# Altium PCB XILINX_LA11.PcbDoc (part 2 of 2)
Units mil, origin at the board's own origin, x right, y up, seen from the top; angles counter-clockwise.
Board outline 4330.71 x 2834.65 mil, 2 copper layers (Top Layer, Bottom Layer); 123 components, 151 nets, 621 pads, 218 vias.
Unrouted connection lines stored in the file: 1.
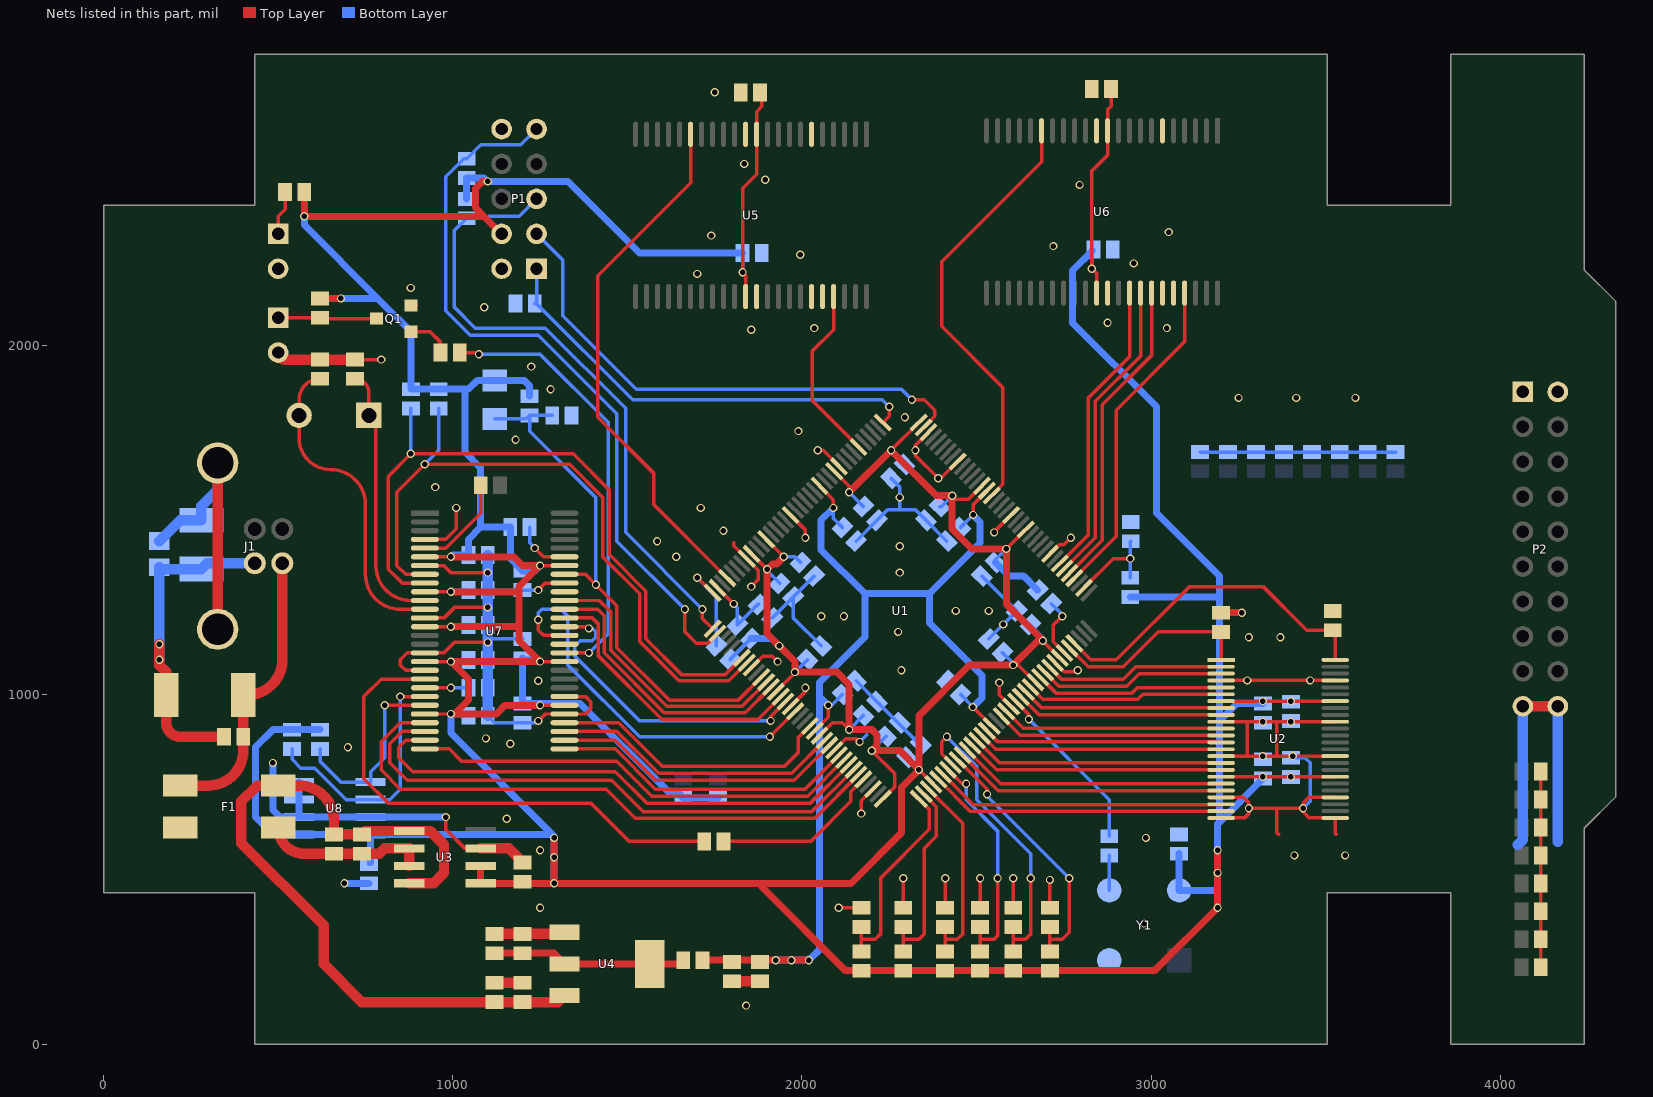
[diagram p2: the nets of this part, all layers, seen from the top]

## Via types
v1: diameter 23.62, hole 15.75, Top Layer to Bottom Layer, 218 vias

## Nets (pads, with @x,y where several pads share a name; then routed paths per layer and width w, separated by ;. In a path a pad name is that pad's centre, name@x,y a point inside that pad or via, vN(x,y) a via of type N, cw(c..) or ccw(c..) an arc to the next point about the centre after c; other vN are vias at no path point) (continued)
DQ29: U1.79 U6.36 | length 857.4
  Top Layer w10: U1.79@2738.14,1375.81 2820,1457.67 2820,1850 2938.03,1968.03 U6.36@2938.03,2150.43
DQ30: U1.78 U6.37 | length 878.6
  Top Layer w10: U1.78@2752.06,1361.89 2840,1449.83 2840,1840 2969.53,1969.53 U6.37@2969.53,2150.43
DQ31: U1.77 U6.38 | length 899.8
  Top Layer w10: U1.77@2765.98,1347.97 2860,1442 2860,1830.46 3001.02,1971.48 U6.38@3001.02,2150.43
FD0: U1.31 U7.25 | length 1703.5
  Top Layer w10: U7.25@920,920 850,920 795,865 795,785 850,730 1440,730 1523,647 2037.17,647 U1.31@2161.87,771.71
FD1: U1.30 U7.26 | length 1605.4
  Top Layer w10: U7.26@920,895 855,895 820,860 820,805 870,755 1455,755 1545,665 2027.33,665 U1.30@2147.95,785.63
FD2: U1.29 U7.27 | length 1501.5
  Top Layer w10: U7.27@920,870 865,870 845,850 845,820 885,780 1465,780 1555,690 2024.49,690 U1.29@2134.03,799.55
FD3: U1.28 U7.28 | length 1298.9
  Top Layer w10: U7.28@920,845 990,845 1025,810 1470,810 1570,710 2016.65,710 U1.28@2120.11,813.46
FD4: U1.27 U7.29 | length 874.2
  Top Layer w10: U7.29@1320,845 1465,845 1580,730 2008.81,730 U1.27@2106.19,827.38
FD5: U1.25 U7.30 | length 847.5
  Top Layer w10: U7.30@1320,870 1465.46,870 1580.46,755 1978.13,755 U1.25@2078.36,855.22
FD6: U1.24 U7.31 | length 833.1
  Top Layer w10: U7.31@1320,895 1470,895 1590,775 1970.29,775 U1.24@2064.44,869.14
FD7: U1.21 U7.32 | length 827.8
  Top Layer w10: U7.32@1320,920 1475,920 1600,795 1950,795 1990,835 1990,878.22 U1.21@2022.68,910.9
fpga_10k: R10.2 U1.67 | length 177.8
  Top Layer w10: v1(2745,1225) 2720,1200 2720,1151.75 U1.67@2752.06,1119.69
  Bottom Layer w10: R10.2@2713.97,1261.03 2745,1230 v1(2745,1225)
FPGA_CH0: U1.64 U2.2 | length 518
  Top Layer w10: U1.64@2710.3,1077.93 2743.23,1045 2920,1045 2955.31,1080.32 U2.2@3200,1080.32
FPGA_CH1: U1.63 U2.3 | length 534.5
  Top Layer w10: U1.63@2696.38,1064.01 2735.39,1025 2930,1025 2965.63,1060.63 U2.3@3200,1060.63
FPGA_CH2: U1.62 U2.5 | length 543
  Top Layer w10: U1.62@2682.46,1050.1 2727.55,1005 2945,1005 2960.09,1020.09 3198.83,1020.09 U2.5@3200,1021.26
FPGA_CH3: U1.60 U2.6 | length 566
  Top Layer w10: U1.60@2654.62,1022.26 2689.88,987 2962,987 2976.57,1001.57 U2.6@3200,1001.57
FPGA_CH4: U1.59 U2.8 | length 578.4
  Top Layer w10: U1.59@2640.7,1008.34 2686.83,962.2 U2.8@3200,962.2
FPGA_CH5: U1.58 U2.9 | length 594.7
  Top Layer w10: U1.58@2626.78,994.42 2678.68,942.52 U2.9@3200,942.52
FPGA_CH6: U1.55 U2.11 | length 635.5
  Top Layer w10: U1.55@2585.02,952.66 2633.36,904.32 3198.83,904.32 U2.11@3200,903.15
FPGA_CH7: U1.54 U2.12 | length 651.8
  Top Layer w10: U1.54@2571.1,938.74 2625.2,884.64 3198.83,884.64 U2.12@3200,883.47
FPGA_CH8: U1.51 U2.13 | length 685.5
  Top Layer w10: U1.51@2530.45,896.98 U1.51@2529.34,896.98 2561.37,864.95 3198.83,864.95 U2.13@3200,863.78
FPGA_CH9: U1.50 U2.14 | length 700.7
  Top Layer w10: U1.50@2515.43,883.06 2554.39,844.09 U2.14@3200,844.09
FPGA_CH10: U1.49 U2.16 | length 725.2
  Top Layer w10: U1.49@2501.51,869.14 2565.92,804.72 U2.16@3200,804.72
FPGA_CH11: U1.48 U2.17 | length 741.5
  Top Layer w10: U1.48@2487.59,855.22 2557.77,785.04 U2.17@3200,785.04
FPGA_CH12: U1.47 U2.19 | length 765.9
  Top Layer w10: U1.47@2473.67,841.3 2569.3,745.67 U2.19@3200,745.67
FPGA_CH13: U1.46 U2.20 | length 783.1
  Top Layer w10: U1.46@2459.75,827.38 2562.13,725 3199.02,725 U2.20@3200,725.99
FPGA_CH14: U1.42 U2.22 | length 832.5
  Top Layer w10: U1.42@2404.07,771.71 2490.78,685 3157.59,685 3158.03,685.44 3198.83,685.44 U2.22@3200,686.61
FPGA_CH15: U1.41 U2.23 | length 847.5
  Top Layer w10: U1.41@2390.15,757.79 2481.01,666.93 U2.23@3200,666.93
GND: C1.1 C2.1 C3.1 C4.1 C5.1 C6.1 C7.1 C8.1 C9.1 C10.1 C11.1 C12.1 C13.1 C14.1 C15.1 C16.1 C17.1 C18.2 C19.2 C20.1 C21.1 C22.2 C23.2 C24.1 C27.2 C28.2 C29.2 C30.2 C31.1 C32.1 C33.1 C34.1 C35.1 C36.1 C37.1 C38.1 C39.1 C40.1 C41.1 C42.1 C43.1 C44.1 C45.1 C47.1 C48.1 C50.1 DS1.2 DS2.2 F1.3 P1.2 P1.10 P2.1 P2.2 P2.19 P2.20 Q1.2 R2.1 R4.1 R7.2 R8.1 R12.1 R14.1 R16.1 R18.1 R21.1 R23.2 R24.2 R25.2 R27.2 R28.1 R29.2 R30.2 R31.2 R32.2 R33.2 R34.2 R35.2 R36.2 R37.2 R38.2 R39.2 R40.2 R58.1 U1.9 U1.17 U1.26 U1.34 U1.56 U1.65 U1.81 U1.89 U1.100 U1.106 U1.118 U1.128 U1.137 U2.4 U2.10 U2.15 U2.21 U2.24 U2.25 U2.28 U2.34 U2.39 U2.45 U3.3 U3.6 U3.7 U4.1 U5.6 U5.12 U5.34 U5.39 U5.40 U6.6 U6.12 U6.34 U6.39 U6.40 U7.4 U7.7 U7.13 U7.17 U7.19 U7.33 U7.35 U7.48 U8.2 U8.3 U8.4 U8.7 Y1.2 | length 11618.6
  Top Layer w10: C45.1@720,1960 v1(795,1960) ; Q1.2@880,2114.8 Q1.2@894.8,2114.8 ; U7.19@920,1070 865,1070 850,1085 850,1100 870,1120 U7.17@920,1120 975,1120 1005,1150 v1(1100,1150) ; U7.13@920,1220 975,1220 1005,1250 v1(1100,1250) ; U7.7@920,1370 975,1370 995,1350 v1(1100,1350) ; U7.4@920,1445 980,1445 1010,1475 v1(1010,1535) ; v1(980,650) 980,615 1035,560 U3.3@1080,560 ; v1@1245,920 v1(1245,925) 1265,945 U7.33@1320,945 1380,945 1395,960 1395,980 1380,995 U7.35@1320,995 ; v1(1245,1300) 1265,1320 U7.48@1320,1320 ; 1805,1435 1805,1426.45 U1.137@1841.73,1389.73 1875,1356.45 1875,1330 v1(1855,1310) ; U1.9@1855.64,1077.93 1887.71,1110 1915,1110 v1(1930,1095) ; U1.17@1967,966.58 2010,1009.58 v1(2010,1020) ; U1.128@1967,1515 2010,1472 v1(2010,1450) ; v1(2045,1700) 2060.39,1700 U1.118@2106.19,1654.2 ; U1.26@2092.28,841.3 2125,874.03 2155.97,874.03 v1(2165,865) ; v1(2105,390) 2169.88,390 R4.1@2170,389.88 ; v1(2170,660) 2170,696.32 U1.34@2203.63,729.95 ; R2.1@2290,389.88 v1(2290,475) ; U1.106@2362.31,1751.63 2325,1714.32 2325,1685 v1(2390,1620) 2397.71,1620 U1.100@2445.83,1668.12 ; R8.1@2410,389.88 v1(2410,475) ; R18.1@2510,389.88 v1(2510,475) ; v1@2550,1466.06 U1.89@2598.94,1515 ; v1(2565,1035) 2565,1000.52 U1.56@2598.94,966.58 ; R16.1@2605,389.88 v1(2605,475) ; R14.1@2710,389.88 v1(2710,470) ; U1.81@2710.3,1403.65 2736.65,1430 2750,1430 v1(2770,1450) ; U1.65@2724.22,1091.85 2725.32,1091.85 2750.85,1066.33 2786.33,1066.33 v1(2790,1070) ; U2.24@3200,647.24 3267.24,647.24 3280,660 v1(3280,675) ; U2.21@3200,706.3 3263.7,706.3 3280,690 v1(3280,675) ; U2.15@3200,824.41 3275,824.41 ; U2.10@3200,922.84 3275,922.84 ; U2.4@3200,1040.95 U2.45@3526.77,1040.95 ; 3360,917.84 3360,824.41 ; 3365,600 3360,605 3360,675 ; U2.28@3526.77,706.3 3451.3,706.3 3435,690 v1(3435,675) ; U2.34@3526.77,824.41 v1(3405,824.41) 3360,824.41 ; U2.39@3526.77,922.84 v1(3400,922.84) v1(3320,922.84) 3275,922.84 ; 3530,600 3526.77,603.23 U2.25@3526.77,647.24 3452.76,647.24 3435,665 v1(3435,675) ; R40.2@4115.12,220 R39.2@4115.12,300 R38.2@4115.12,380 R37.2@4115.12,460 R36.2@4115.12,540 R35.2@4115.12,620 R34.2@4115.12,700 R33.2@4115.12,780 ; 3275,824.41 v1(3320,824.41) 3360,824.41 ; 3275,824.41 3275,922.84 ; v1(3280,675) 3360,675 ; 3360,675 v1(3435,675)
  Top Layer w30: DS2.2@500,1980 ccw(c520,1980) 520,1960 C44.1@620,1960 C45.1@720,1960 ; U3.7@875.28,510 U3.6@875.28,560 805,560 789.88,544.88 C22.2@740,544.88 C23.2@660,544.88 575.12,544.88 ; U3.3@1080,560 1160,560 C24.1@1200,520 ; C27.2@1120,175.12 C29.2@1200,175.12 ; C28.2@1120,315.12 C30.2@1200,315.12 1315.12,315.12 U4.1@1320,320 ; C31.1@1800,180 C32.1@1880,180 ; P2.19@4064.25,967.24 P2.20@4164.25,967.24 ; 575.12,544.88 cw(c575.12,620) F1.3@500,620 ccw(c575.12,620) 575.12,544.88
  Bottom Layer w10: C40.1@1100,940 1120,920 C47.1@1200,920 1240,920 v1(1245,925) ; v1(1100,1150) 1110,1160 C42.1@1200,1160 ; C37.1@1100,1300 C41.1@1200,1300 v1(1245,1300) ; R12.1@1915,1220 C12.1@1975,1280 ; C11.1@2035,1340 C12.1@1975,1280 ; C1.1@2055,1140 1975,1220 C12.1@1975,1280 ; C14.1@2155,1040 C2.1@2215,980 2335,860 C4.1@2340,860 ; C17.1@2155,1440 C10.1@2215,1500 2245,1530 2280,1530 ; v1(2165,865) 2185.2,885.2 ; C9.1@2255,1620 2280,1595 2280,1530 ; C16.1@2415,1440 C8.1@2355,1500 2325,1530 2280,1530 ; C7.1@2515,1340 C6.1@2615,1240 C5.1@2535,1160 ; R32.2@3140,1695.12 R31.2@3220,1695.12 R30.2@3300,1695.12 R29.2@3380,1695.12 R27.2@3460,1695.12 R25.2@3540,1695.12 R24.2@3620,1695.12 R23.2@3700,1695.12 ; C20.1@3400,820 3440,820 3455,805 3455,695 v1(3435,675)
  Bottom Layer w20: v1(485,805) 485,670 505,650 U8.2@560,650 ; U8.4@560,750 U8.3@560,700 U8.2@560,650 ; v1(690,460) C50.1@760,460 ; v1(980,650) U8.7@764.72,650 U8.2@560,650
  Bottom Layer w30: C40.1@1100,940 R58.1@1100,1020 C39.1@1100,1100 v1(1100,1150) C38.1@1100,1200 v1(1100,1250) C37.1@1100,1300 v1(1100,1350) C43.1@1100,1400 ; 4050,570 4064.25,584.25 P2.19@4064.25,967.24 ; 4164.25,579.25 P2.20@4164.25,967.24
  other v1: 1840,110 2980,345 1250,390 3410,540 3555,540 1250,555 2985,590 1155,645 700,850 1165,860 1095,875 1245,1040 3275,1040.95 3455,1040.95 2285,1070 3280,1165 3370,1165 2275,1180 2576.37,1201.37 2055,1225 2120,1225 2440,1240 2535,1240 2280,1350 1640,1395 2280,1425 1585,1440 2550,1465 1775,1470 1710,1535 2280,1565 950,1595 2325,1700 1180,1730 1990,1755 2295,1795 3250,1850 3415,1850 3585,1850 1280,1875 1225,1940 1855,2045 2035,2050 3045,2050 2875,2065 1090,2110 880,2165 1700,2205 2950,2235 1995,2260 2720,2285 1740,2315 3050,2325 2795,2460 1895,2475 1835,2520 1750,2725
GND_POWER: C25.2 C26.2 C49.2 F1.2 J1.4 R48.2 | length 968.5
  Top Layer w30: v1(160,1145) v1(160,1100) 160,1085 179.53,1065.47 C26.2@179.53,1000 179.53,920.47 ccw(c220,920.47) 220,880 C25.2@344.88,880
  Bottom Layer w30: v1(160,1100) v1(160,1145) R48.2@160,1365.2 165.2,1360 C49.2@280,1360 296.51,1376.51 J1.4@433.26,1376.51
IFCLK: R47.2 U1.32 | length 490.1
  Top Layer w10: R47.2@1775.12,580 2025,580 2140,695 2140,722 U1.32@2175.79,757.79
M0: R1.2 R2.2 U1.38 | length 566.7
  Top Layer w10: R1.2@2290,265 2290,300 ; R2.2@2290,334.76 2290,300 ; U1.38@2348.39,716.03 2385,679.42 2385,595 2350,560 2350,315 2335,300 2290,300
M1: R3.2 R4.2 U1.37 | length 588.7
  Top Layer w10: R3.2@2170,265 2170,300 ; R4.2@2170,334.76 2170,300 ; U1.37@2334.47,702.11 2365,671.58 2365,615 2225,475 2225,315 2210,300 2170,300
M2: R6.2 R8.2 U1.39 | length 581.4
  Top Layer w10: U1.39@2362.31,729.95 2460,632.26 2460,315 2445,300 2410,300 ; R6.2@2410,265 2410,300 ; R8.2@2410,334.76 2410,300
NetC28_1: C28.1 C30.1 L1.1 U4.2 U4.4 | length 557
  Top Layer w20: C28.1@1120,260 C30.1@1200,260 1289.45,260 U4.4@1320,229.45 U4.2@1564.09,229.45 1649.45,229.45 L1.1@1660,240
NetC44_1: C44.2 U7.12 Y2.2 | length 929.7
  Top Layer w10: C44.2@620,1904.88 ccw(c620,1844.88) 560,1844.88 Y2.2@560,1800 560,1735 ccw(c650,1735) 650,1645 cw(c650,1545) 750,1545 750,1345 ccw(c850,1345) 850,1245 U7.12@920,1245
NetC45_2: C45.2 U7.11 Y2.1 | length 766.2
  Top Layer w10: C45.2@720,1904.88 cw(c720,1864.88) 760,1864.88 Y2.1@760,1800 cw(c760,1780) 780,1780 780,1370 ccw(c880,1370) 880,1270 U7.11@920,1270
NetDS1_1: DS1.1 R41.1 | length 128.3
  Top Layer w10: DS1.1@500,2320 500,2370 520,2390 R41.1@520,2440
NetDS2_1: DS2.1 Q1.3 R42.1 | length 282.7
  Top Layer w10: DS2.1@500,2080 R42.1@620,2080 622.6,2077.4 Q1.3@781.57,2077.4
NetDS3_1: 
NetQ1_2: Q1.1 R43.2 | length 127.4
  Top Layer w10: Q1.1@880,2040 935,2040 964.88,2010.12 R43.2@964.88,1980
NetQ2_2: 
NetR5_2: R5.2 R7.1 U1.74 | length 272.5
  Top Layer w10: U1.74@2807.73,1306.21 2891.52,1390 v1(2940,1390)
  Bottom Layer w10: R5.2@2940,1335.12 v1(2940,1390) 2940,1438.48 R7.1@2941.52,1440
NetR9_1: R9.1 U1.144 | length 279.8
  Top Layer w10: v1(1700,1335) 1701.58,1335 U1.144@1744.29,1292.29
  Bottom Layer w10: v1(1700,1335) 1755,1280 R9.1@1755,1140
NetR11_1: R11.1 R12.2 U1.143 | length 215.2
  Top Layer w10: U1.143@1758.21,1306.21 v1(1804.42,1260)
  Bottom Layer w10: v1(1804.42,1260) 1815,1249.42 R11.1@1815,1200 1873.97,1258.97 R12.2@1876.03,1258.97
NetR22_1: R22.1 Y1.3 | length 100
  Bottom Layer w10: Y1.3@2880,440 R22.1@2880,540
NetR47_1: R47.1 U7.20 | length 1480.3
  Top Layer w10: U7.20@920,1045 795,1045 745,995 745,760 815,690 1395,690 1505,580 R47.1@1720,580
NetR49_1: R49.1 U7.5 | length 281.7
  Top Layer w10: U7.5@920,1420 980.46,1420 1080,1519.54 R49.1@1080,1600
NetR50_1: R50.1 U7.51 | length 161.6
  Top Layer w10: v1(1235,1420) 1260,1395 U7.51@1320,1395
  Bottom Layer w10: R50.1@1220,1480 1220,1435 v1(1235,1420)
NetR58_2: R58.2 U7.21 | length 124.9
  Top Layer w10: U7.21@920,1020 v1(995,1020)
  Bottom Layer w10: v1(995,1020) R58.2@1044.88,1020
NLOGICDIR: R26.1 U1.68 U2.1 | length 577.7
  Top Layer w10: U1.68@2765.98,1133.61 2819.59,1080 2920,1080 3020,1180 R26.1@3200,1180 U2.1@3200,1100
NLOGICOE: R28.2 U1.69 U2.48 | length 986.3
  Top Layer w10: U1.69@2779.89,1147.53 2827.43,1100 2900,1100 3110,1310 3320,1310 3445.12,1184.88 R28.2@3520,1184.88 3526.77,1178.11 U2.48@3526.77,1100
NOE_RAM1: U1.114 U5.41 | length 510.2
  Top Layer w10: U5.41@2090.51,2140.43 2090.51,2045.51 2030,1985 2030,1841.75 U1.114@2161.87,1709.88
NOE_RAM2: U1.76 U6.41 | length 947.1
  Top Layer w10: U1.76@2779.89,1334.05 2900,1454.16 2900,1815 3095.51,2010.51 U6.41@3095.51,2150.43
NWE_RAM1: U1.141 U5.17 | length 1534.8
  Top Layer w10: U5.17@1681.06,2605 1681.06,2466.06 1415,2200 1415,1795 1575,1635 1575,1545.1 U1.141@1786.05,1334.05
NWE_RAM2: U1.93 U6.17 | length 1248.4
  Top Layer w10: U1.93@2543.26,1570.68 2575,1602.42 2575,1880 2400,2055 2400,2240 2686.06,2526.06 U6.17@2686.06,2615
PA0: R43.1 U7.40 | length 1255.9
  Top Layer w10: R43.1@1020,1980 1070,1980 v1(1075,1975) ; U7.40@1320,1120 v1(1390,1120)
  Bottom Layer w10: v1@1080,1975 1250,1975 1445,1780 1445,1174.54 1390.46,1120 v1(1390,1120)
PA1: U7.41
PA2: U1.18 U7.42 | length 1134.6
  Top Layer w10: v1(1245,1215) 1245,1185 1260,1170 U7.42@1320,1170 ; v1(1908.26,880) U1.18@1980.92,952.66
  Bottom Layer w10: v1(1245,1215) 1245,1235 1255,1245 1310,1245 1330,1225 1330,1085 1535,880 v1(1908.26,880)
PA3: U1.16 U7.43 | length 921.5
  Top Layer w10: U7.43@1320,1195 1385,1195 v1(1390,1190) ; v1(1910,925) 1910,937.42 U1.16@1953.08,980.5
  Bottom Layer w10: v1(1390,1190) 1400,1190 1410,1180 1410,1165 1400,1155 1365,1155 1350,1140 1350,1110 1535,925 v1(1910,925)
PA4: U1.15 U7.44 | length 819.5
  Top Layer w10: U7.44@1320,1220 1400,1220 1416,1204 1416,1112.63 1598.63,930 1874.74,930 U1.15@1939.16,994.42
PA5: U1.13 U7.45 | length 806.3
  Top Layer w10: U7.45@1320,1245 1415,1245 1434,1226 1434,1120.09 1605.09,949 1838.07,949 U1.13@1911.32,1022.26
PA6: U1.12 U7.46 | length 796.3
  Top Layer w10: U7.46@1320,1270 1420,1270 1452,1238 1452,1127.54 1612.54,967 1828.23,967 U1.12@1897.4,1036.18
PA7: U7.47
RDY0/SLRD#: R55.1 U1.8 U7.8 | length 1970.1
  Top Layer w10: U7.8@920,1345 865,1345 840,1370 840,1580 v1(920,1660) 1335,1660 1430,1565 1430,1394.54 1535,1289.54 1535,1152.72 1647.72,1040 1789.87,1040 U1.8@1841.73,1091.85
  Bottom Layer w10: v1(920,1660) 960,1700 R55.1@960,1820
RDY1/SLWR#: R54.1 U1.7 U7.9 | length 2026.1
  Top Layer w10: U7.9@920,1320 855,1320 815,1360 815,1625 v1(880,1690) 1344.54,1690 1448,1586.54 1448,1402 1553,1297 1553,1160.18 1655.18,1058 1780.03,1058 U1.7@1827.81,1105.77
  Bottom Layer w10: v1(880,1690) R54.1@880,1820
SCL: R56.2 U7.22 U8.6 | length 734.9
  Top Layer w10: v1(850,995) U7.22@920,995
  Bottom Layer w10: R56.2@540,844.88 540,815 565,790 605,790 695,700 U8.6@764.72,700 820,700 850,730 v1(850,995)
SDA: R57.2 U7.23 U8.5 | length 556.1
  Top Layer w10: v1(805,970) U7.23@920,970
  Bottom Layer w10: R57.2@620,844.88 620,810 680,750 U8.5@764.72,750 765,750.28 765,780 805,820 v1(805,970)
SYSCLK: R22.2 U1.57 | length 496
  Top Layer w10: U1.57@2612.86,980.5 2650,943.36 v1(2650,930)
  Bottom Layer w10: v1(2650,930) 2880,700 R22.2@2880,595.12
SYSRST: C48.2 D1.1 R44.1 U1.11 U7.49 | length 1542.8
  Top Layer w10: U7.49@1320,1345 1380.46,1345 1380.46,1344.54 v1(1410,1315) 1470,1255 1470,1135 1620,985 1818.39,985 U1.11@1883.48,1050.1
  Bottom Layer w10: D1.1@1120,1790 1210,1790 R44.1@1220,1800 ; C48.2@1284.88,1800 R44.1@1220,1800 ; v1(1410,1315) 1410,1565 1220,1755 R44.1@1220,1800
TCK: P1.1 R21.2 U1.109 | length 1292.3
  Top Layer w10: U1.109@2231.47,1779.47 2250,1798 v1(2250,1825)
  Bottom Layer w10: P1.1@1240,2220 1240,2124.88 R21.2@1235.12,2120 1240,2120 1515,1845 2230,1845 v1(2250,1825)
TDI: P1.9 R19.2 U1.2 | length 2135.9
  Top Layer w10: v1(1665,1245) 1665,1180 1697,1148 1730.84,1148 U1.2@1758.21,1175.37
  Bottom Layer w10: P1.9@1240,2620 1195,2575 1079.88,2575 R19.2@1040,2535.12 1031.46,2535.12 980,2483.66 980,2100 1050,2030 1245,2030 1470,1805 1470,1440 v1(1665,1245)
TDO: P1.3 U1.107 | length 1505.4
  Top Layer w10: v1(2315,1845) 2350,1845 2380,1815 2380,1797.16 U1.107@2348.39,1765.55
  Bottom Layer w10: P1.3@1240,2320 1315,2245 1315,2085 1525,1875 2285,1875 v1(2315,1845)
TMS: P1.5 R20.2 U1.1 | length 1836.3
  Top Layer w10: v1(1715,1245) 1715,1218.58 U1.1@1744.29,1189.29
  Bottom Layer w10: P1.5@1240,2420 1190,2370 1105,2370 1099.88,2364.88 R20.2@1040,2364.88 1005,2329.88 1005,2110 1065,2050 1265,2050 1495,1820 1495,1465 v1(1715,1245)
USBSHEILD: C49.1 J1.5 R48.1 | length 804.6
  Top Layer w30: J1.5@326.96,1187.53 J1.5@326.96,1663.91
  Bottom Layer w30: R48.1@160,1440 220,1500 C49.1@280,1500 280,1540 326.96,1586.96 J1.5@326.96,1663.91
VBUS: C25.1 C26.1 F1.1 J1.1 | length 842.7
  Top Layer w30: F1.1@220,740 300,740 ccw(c300,840) 400,840 C25.1@400,880 C26.1@400,1000 412,1000 ccw(c412,1100) 512,1100 J1.1@512,1376.51
VCC5: C22.1 C23.1 C27.1 C29.1 F1.4 U3.5 U3.8 U4.3 | length 2214.3
  Top Layer w30: U3.8@875.28,460 945,460 975,490 975,570 935,610 U3.5@875.28,610 800,610 750,610 C22.1@740,600 C23.1@660,600 660,640 ccw(c560,640) 560,740 F1.4@500,740 440,740 395,695 395,575 630,340 630,230 740,120 C27.1@1120,120 C29.1@1200,120 1301.1,120 U4.3@1320,138.9
VCC12: C14.2 C15.2 C16.2 C17.2 C31.2 C32.2 L1.2 U1.22 U1.52 U1.94 U1.122 | length 3296.4
  Top Layer w10: U1.22@2036.6,896.98 2075,935.38 v1(2075,970) ; U1.122@2050.52,1598.52 2090,1559.04 v1(2090,1535) ; v1(2489.17,965) U1.52@2543.26,910.9 ; v1(2490,1515) 2490,1545 2529.34,1584.34 U1.94@2529.34,1584.6
  Top Layer w20: L1.2@1715.12,240 1875.12,240 C32.2@1880,235.12 1884.88,240 v1(2020,240)
  Bottom Layer w10: v1(2075,970) 2085,970 C14.2@2116.03,1001.03 ; v1(2090,1535) 2090,1505 C17.2@2116.03,1478.97 ; C15.2@2453.97,1001.03 2489.17,965.83 v1(2489.17,965) ; C16.2@2453.97,1478.97 v1(2490,1515)
  Bottom Layer w20: v1(1925,240) v1(2020,240) 2050,270 2050,995 ; v1(2075,970) 2050,995 ; v1(2090,1535) 2055,1500 2055,1415 2180,1290 ; v1(2489.17,965) 2515,990.83 2515,1055 2365,1205 2365,1290 ; v1(2490,1515) 2510,1495 2510,1435 2365,1290 ; 2050,995 2050,1035 2180,1165 2180,1290 ; 2180,1290 2365,1290
  other v1: 1970,240
VCC33: C1.2 C2.2 C3.2 C4.2 C5.2 C6.2 C7.2 C8.2 C9.2 C10.2 C11.2 C12.2 C13.2 C18.1 C19.1 C20.2 C21.2 C24.2 C33.2 C34.2 C35.2 C36.2 C37.2 C38.2 C39.2 C40.2 C41.2 C42.2 C43.2 C47.2 C50.2 D1.2 P1.4 R1.1 R3.1 R5.1 R6.1 R9.2 R10.1 R11.2 R13.1 R15.1 R17.1 R19.1 R20.1 R26.2 R41.2 R42.2 R44.2 R50.2 R51.2 R52.2 R54.2 R55.2 R56.1 R57.1 U1.14 U1.23 U1.36 U1.40 U1.61 U1.66 U1.86 U1.95 U1.108 U1.119 U1.133 U1.136 U2.7 U2.18 U2.31 U2.42 U3.1 U3.2 U5.11 U5.33 U6.11 U6.33 U7.6 U7.10 U7.14 U7.18 U7.24 U7.34 U7.39 U7.50 U8.1 U8.8 Y1.4 | length 21954.2
  Top Layer w10: U7.24@920,945 v1(995,945) ; U7.18@920,1095 v1(995,1095) ; U7.14@920,1195 v1(995,1195) ; U7.10@920,1295 v1(995,1295) ; U7.6@920,1395 v1(995,1395) ; v1(1250,970) U7.34@1320,970 ; v1(1250,1095) U7.39@1320,1095 ; v1(1250,1370) U7.50@1320,1370 ; U5.33@1838.54,2140.43 1838.54,2201.46 v1(1830,2210) 1830,2450 1870.04,2490.04 U5.11@1870.04,2605 1870.04,2669.96 1885,2684.92 1885,2720.12 C33.2@1880.12,2725 ; U1.136@1855.64,1403.65 v1(1900,1359.29) ; U1.133@1897.4,1445.41 v1(1947.81,1395) ; U1.14@1925.24,1008.34 v1@1980,1063.1 ; U1.23@2050.52,883.06 2087.45,920 2115,920 v1(2135,900) ; U1.119@2092.28,1640.28 2135,1597.55 v1(2135,1580) ; v1(2200,840) 2265,775 2265,735.64 U1.36@2231.47,702.11 ; v1(2255,1700) U1.108@2334.47,1779.47 ; v1(2335.1,785) U1.40@2376.23,743.87 ; v1(2430,1570) 2440,1560 2476.91,1560 U1.95@2515.43,1598.52 ; v1(2585,1417.55) U1.86@2640.7,1473.25 ; v1(2605,1085) 2619.71,1085 U1.61@2668.54,1036.18 ; v1(2690,1155) 2690,1153.91 U1.66@2738.14,1105.77 ; U6.33@2843.54,2150.43 2843.54,2206.46 v1(2830,2220) 2830,2500 2875.04,2545.04 U6.11@2875.04,2615 2875.04,2675.04 2885.12,2685.12 C34.2@2885.12,2735 ; U2.18@3200,765.36 v1(3320,765.36) v1(3400,765.36) U2.31@3526.77,765.36 ; U2.7@3200,981.89 v1(3320,981.89) v1(3400,981.89) U2.42@3526.77,981.89
  Top Layer w20: R41.2@575.12,2440 575.12,2370.12 v1(575,2370) 1087.21,2370 1088.61,2371.39 ; R42.2@620,2135.12 679.88,2135.12 v1(680,2135) ; v1(995,945) v1@1005,945 ; v1(995,1195) 1190,1195 ; v1(995,1295) 1190,1295 ; v1(995,1395) 1175,1395 1200,1370 v1(1250,1370) 1190,1310 1190,1295 ; U3.2@1080,510 U3.1@1080,460 v1(1290,460) ; v1(1100,2470) 1085,2470 1065,2450 1065,2395 1088.61,2371.39 ; P1.4@1140,2320 1088.61,2371.39 ; v1(1250,970) 1150,970 1125,945 v1@1005,945 ; v1(1290,590) v1(1290,535) v1(1290,460) ; 1885,449.76 2124.88,209.88 R3.1@2170,209.88 R1.1@2290,209.88 R6.1@2410,209.88 R17.1@2510,209.88 R15.1@2605,209.88 R13.1@2710,209.88 3009.88,209.88 v1(3190,390) v1(3190,490) v1(3190,555) ; v1(1947.81,1395) 1927.81,1375 1915.71,1375 v1(1900,1359.29) 1900,1175 v1(1935,1140) 1980,1095 v1(1980,1065) 2100,1065 2135,1030 v1(2135,900) 2200,900 2215,885 2215,855 v1(2200,840) 2280.1,840 v1(2335.1,785) ; v1(2135,1580) v1(2255,1700) 2385,1570 v1(2430,1570) 2430,1475 2487.45,1417.55 v1(2585,1417.55) 2585,1260 v1(2690,1155) ; v1@2690,1153.91 2673.91,1153.91 v1(2605,1085) 2480,1085 2335.1,940.1 v1(2335.1,785) ; R26.2@3200,1235.12 v1(3259.88,1235.12) v1@3260,1235 ; v1@1005,945 1045,985 1045,1045 v1(995,1095) v1(1250,1095) 1190,1155 1190,1195 ; 1190,1195 1190,1295 ; v1(1290,460) 2140,460 2285,605 2285,734.9 v1(2335.1,785)
  Bottom Layer w10: C50.2@760,515.12 C50.2@764.72,519.84 ; v1(995,945) 1000,940 C40.2@1044.88,940 ; v1(995,1095) 1000,1100 C39.2@1044.88,1100 ; v1(995,1195) 1000,1200 C38.2@1044.88,1200 ; v1(995,1295) 1000,1300 C37.2@1044.88,1300 ; C42.2@1200,1104.88 1240.12,1104.88 v1(1250,1095) ; R9.2@1793.97,1101.03 R11.2@1853.97,1161.03 ; C35.2@1829.88,2265 1830,2264.88 v1(1830,2210) ; v1(1900,1359.29) 1900,1355 C12.2@1936.03,1318.97 ; v1(1947.81,1395) 1980,1395 C11.2@1996.03,1378.97 ; v1(1980,1065) C1.2@2016.03,1101.03 ; v1(2135,900) C2.2@2176.03,941.03 ; v1(2135,1580) C10.2@2176.03,1538.97 ; v1(2200,840) C3.2@2241.03,881.03 ; v1(2255,1700) 2255,1697.95 C9.2@2293.97,1658.97 ; C4.2@2301.03,821.03 2335.1,786.95 v1(2335.1,785) ; C8.2@2393.97,1538.97 2398.97,1538.97 v1(2430,1570) ; C7.2@2553.97,1378.97 2553.97,1386.52 v1(2585,1417.55) ; C5.2@2573.97,1121.03 2605,1090 v1(2605,1085) ; C6.2@2653.97,1201.03 2690,1165 v1(2690,1155) ; v1(2830,2220) 2830,2270.12 C36.2@2834.88,2275
  Bottom Layer w20: v1(575,2370) 575,2345 785,2135 ; R57.1@620,900 R56.1@540,900 485,900 435,850 435,650 485,600 U8.1@560,600 U8.8@764.72,600 ; v1(680,2135) 785,2135 ; C50.2@764.72,519.84 U8.8@764.72,600 ; v1(995,945) 995,890 v1@1285,600 ; v1(995,1395) 1000,1400 C43.2@1044.88,1400 1044.88,1444.88 1080,1480 ; R20.1@1040,2420 R19.1@1040,2480 1090,2480 v1(1100,2470) 1330,2470 1535,2265 C35.2@1829.88,2265 ; C42.2@1200,1104.88 C47.2@1200,975.12 v1@1244.88,975.12 ; R44.2@1220,1855.12 1220,1885 1204.76,1900.24 D1.2@1120,1900.24 1070.24,1900.24 1045.12,1875.12 1035,1875.12 ; v1(1250,970) v1@1244.88,975.12 ; v1(1250,1370) 1235.12,1355.12 C41.2@1200,1355.12 1164.88,1390.24 R50.2@1164.88,1480 1080,1480 ; v1(1290,460) v1(1290,535) v1(1290,590) 1290,595 v1@1285,600 ; R52.2@1760,704.88 R51.2@1660,704.88 1642.57,722.32 1617.68,722.32 1364.88,975.12 v1@1244.88,975.12 ; R11.2@1853.97,1161.03 1913.97,1161.03 v1(1935,1140) ; C7.2@2553.97,1378.97 2592.95,1340 2635,1340 R10.1@2675,1300 ; C36.2@2830,2270.12 2775,2215.12 2775,2065 3015,1825 3015,1520 3195,1340 3195,1235 ; R5.1@2940,1280 3190,1280 ; C13.2@3080,544.88 Y1.4@3080,440 3190,440 ; v1(3190,390) 3190,440 ; v1@3259.76,1235 3195,1235 ; C19.1@3320,760 3195,635 ; C21.2@3320,975.12 3245.12,975.12 3195,925 ; U8.8@764.72,600 v1@1285,600 ; 785,2135 880,2040 R54.2@880,1875.12 R55.2@960,1875.12 1035,1875.12 ; 1035,1875.12 1035,1695 1080,1650 1080,1480 ; 3190,440 v1(3190,490) v1(3190,555) 3190,630 3195,635 ; 3195,635 3195,925 ; 3195,925 3195,1235
VS0: R13.2 R14.2 U1.45 | length 758.7
  Top Layer w10: U1.45@2445.83,813.46 2530,729.29 v1(2530,715) ; R13.2@2710,265 2710,300 ; R14.2@2710,334.76 2710,300 ; v1(2765,475) 2765,320 2745,300 2710,300
  Bottom Layer w10: v1(2530,715) 2530,710 v1(2765,475)
VS1: R15.2 R16.2 U1.44 | length 890.3
  Top Layer w10: v1(2415,880) 2400,865 2400,831.45 U1.44@2431.91,799.55 ; R15.2@2605,265 2605,300 ; R16.2@2605,334.76 2605,300 ; v1(2655,475) 2655,315 2640,300 2605,300
  Bottom Layer w10: v1(2415,880) 2500,795 2500,700 2655,545 v1(2655,475)
VS2: R17.2 R18.2 U1.43 | length 665
  Top Layer w10: U1.43@2417.99,785.63 2458.62,745 v1(2470,745) ; R17.2@2510,265 2510,300 ; R18.2@2510,334.76 2510,300 ; v1(2560,475) 2560,310 2550,300 2510,300
  Bottom Layer w10: v1(2470,745) 2470,700 2560,610 v1(2560,475)
pads on no net: P1.6 P1.7 P1.8 U1.33 U1.35 U1.53 U1.73 U1.80 U1.97 U1.123 U1.140 U3.4 U5.28 U6.28 U7.1 U7.2 U7.3 U7.52 U7.53 U7.54 U7.55 U7.56 Y1.1

## Polygon pours and split planes (outlines as drawn)
GND_POWER on Top Layer "Top Layer-No Net" (solid, pour order 1000): 50,1150 350,1150 375,1150 375,475 50,475 50,1150
GND on Top Layer "Top Layer-No Net" (solid, pour order 1000): 50,2375 450,2375 450,2800 3450,2800 3450,2370 4200,2370 4200,25 3875,25 3875,450 3475,450 3475,25 450,25 450,475 400,475 400,1175 50,1175 400,1175 400,1725 50,1725 50,2375
GND on Top Layer "Top Layer-No Net" (solid, pour order 1001): 3875,2370 3875,2800 4200,2800 4200,2370
GND on Bottom Layer "Top Layer-No Net" (solid, pour order 1002): 50,2375 450,2375 450,2800 3450,2800 3450,2370 4200,2370 4200,25 3875,25 3875,450 3475,450 3475,25 450,25 450,475 425,475 400,475 400,1725 50,1725 50,2375
GND on Bottom Layer "Top Layer-No Net" (solid, pour order 1003): 3875,2370 3875,2800 4200,2800 4200,2370

## Keep-outs
Keep-Out Layer:
  circle w10: c885.83,275.59 r78.74
  circle w10: c3307.09,275.59 r78.74
  circle w10: c3307.09,2559.06 r78.74
  circle w10: c885.83,2559.06 r78.74
  lines w10: 0,433.07 0,2401.57 433.07,2401.57 433.07,2834.65 3503.94,2834.65 3503.94,2401.57 3858.27,2401.57 3858.27,2834.65 4240,2834.65 4240,2626.77 4240,2393.86 4240,2216.69 4330.71,2125.98 4330.71,708.66 4240,617.95 4240,0 3858.27,0 3858.27,433.07 3503.94,433.07 3503.94,0 433.07,0 433.07,433.07 0,433.07

## Other copper
Top Layer:
  pour cut-out: 725,1500 720,1235 760.31,1199.78 985,1205 985,1120 675,1120 625,1175 625,1425 375,1425 375,1550 675,1550
Multi-Layer:
  pour cut-out: 2650,1075 2670,1055 2895,1055 2975,1135 3560,1135 3735,1310 3735,1520 4010,1795 4220,1795 4220,680 4225,675 4175,625 2500,625 2365,760 2365,795 2370,795

## Text inside footprints (layer, text, board x,y; h text height)
P1: Top Overlay "10" at 1150,2690 h20 r90; Top Overlay "9" at 1260,2690 h20 r90; Top Overlay "1" at 1250,2145 h20 r90; Top Overlay "2" at 1145,2140 h20 r90
P2: Top Overlay "20" at 4154.25,892.24 h20 r270; Top Overlay "19" at 4049.25,892.24 h20 r270; Top Overlay "1" at 4044.25,1967.24 h20 r270; Top Overlay "2" at 4144.25,1972.24 h20 r270